# EAGLE board 48-tqfp breakout (EAGLE 9.2.2)
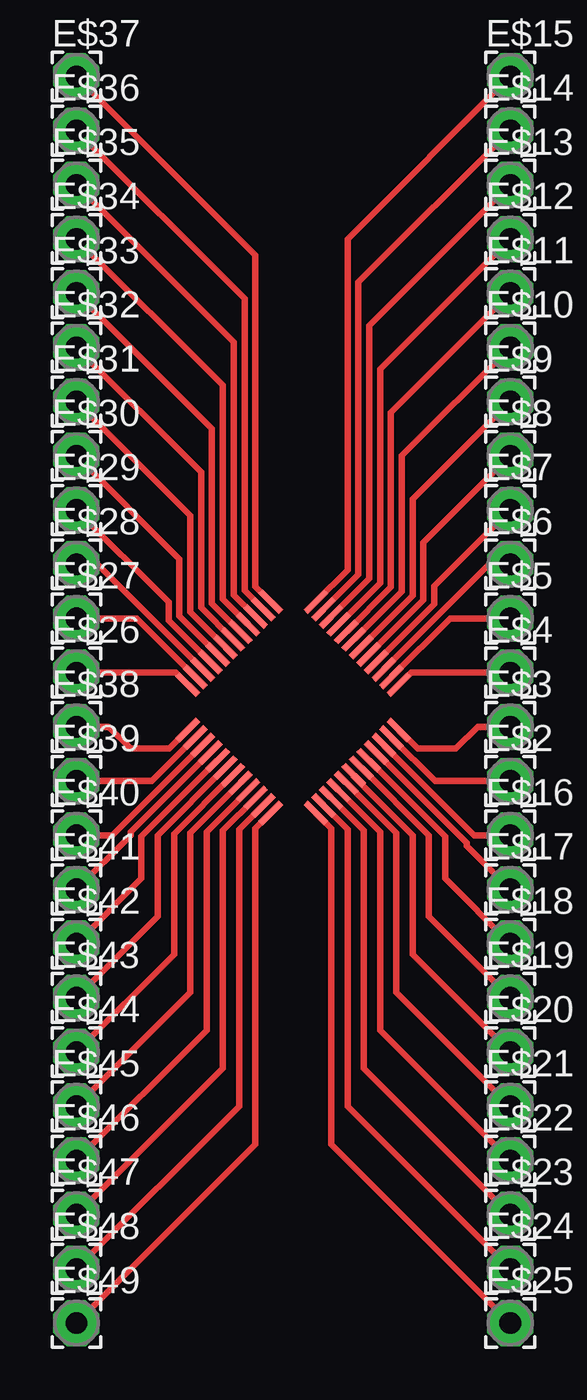
[diagram p0: board, top side]

No outline drawn. Coordinates in mm, seen from the top.
Copper layers (1*16): Top 0.035mm / dielectric 1.5mm / Bottom 0.035mm
Design rules "default": minimum track width 6mil, minimum drill 0.35mm, track to track 6mil, track to pad 6mil, pad to pad 6mil, via to via 6mil, smd to smd 6mil, copper to edge 40mil, drill to drill 6mil, minimum pad ring 10mil, minimum via ring 8mil, stop-mask expansion 4mil, vias tented up to drill 0mil, thermal gap 10mil

## Footprints (pad centres in the part's own frame; a part is rotated, then mirrored left to right if it is on the bottom)
TQFP-48 = smd 1.35 x 0.29: 1 -4,2.5; 2 -4,2; 3 -4,1.5; 4 -4,1; 5 -4,0.5; 6 -4,0; 7 -4,-0.5; 8 -4,-1; 9 -4,-1.5; 10 -4,-2; 11 -4,-2.5; 12 -4,-3; 25 4.5,-3; 26 4.5,-2.5; 27 4.5,-2; 28 4.5,-1.5; 29 4.5,-1; 30 4.5,-0.5; 31 4.5,0; 32 4.5,0.5; 33 4.5,1; 34 4.5,1.5; 35 4.5,2; 36 4.5,2.5 | smd 0.29 x 1.35: 13 -2.5,-4.5; 14 -2,-4.5; 15 -1.5,-4.5; 16 -1,-4.5; 17 -0.5,-4.5; 18 0,-4.5; 19 0.5,-4.5; 20 1,-4.5; 21 1.5,-4.5; 22 2,-4.5; 23 2.5,-4.5; 24 3,-4.5; 37 3,4; 38 2.5,4; 39 2,4; 40 1.5,4; 41 1,4; 42 0.5,4; 43 0,4; 44 -0.5,4; 45 -1,4; 46 -1.5,4; 47 -2,4; 48 -2.5,4
2,15/1,0 = drill 1.016 pad 2.159 octagon: 1 0,0

## Placement (x,y rotation side)
E$1  [TQFP-48]  15.24,8.89 315 top
E$2  [2,15/1,0]  25.4,5.08 0 top
E$3  [2,15/1,0]  25.4,7.62 0 top
E$4  [2,15/1,0]  25.4,10.16 0 top
E$5  [2,15/1,0]  25.4,12.7 0 top
E$6  [2,15/1,0]  25.4,15.24 0 top
E$7  [2,15/1,0]  25.4,17.78 0 top
E$8  [2,15/1,0]  25.4,20.32 0 top
E$9  [2,15/1,0]  25.4,22.86 0 top
E$10  [2,15/1,0]  25.4,25.4 0 top
E$11  [2,15/1,0]  25.4,27.94 0 top
E$12  [2,15/1,0]  25.4,30.48 0 top
E$13  [2,15/1,0]  25.4,33.02 0 top
E$14  [2,15/1,0]  25.4,35.56 0 top
E$15  [2,15/1,0]  25.4,38.1 0 top
E$16  [2,15/1,0]  25.4,2.54 0 top
E$17  [2,15/1,0]  25.4,0 0 top
E$18  [2,15/1,0]  25.4,-2.54 0 top
E$19  [2,15/1,0]  25.4,-5.08 0 top
E$20  [2,15/1,0]  25.4,-7.62 0 top
E$21  [2,15/1,0]  25.4,-10.16 0 top
E$22  [2,15/1,0]  25.4,-12.7 0 top
E$23  [2,15/1,0]  25.4,-15.24 0 top
E$24  [2,15/1,0]  25.4,-17.78 0 top
E$25  [2,15/1,0]  25.4,-20.32 0 top
E$26  [2,15/1,0]  5.08,10.16 0 top
E$27  [2,15/1,0]  5.08,12.7 0 top
E$28  [2,15/1,0]  5.08,15.24 0 top
E$29  [2,15/1,0]  5.08,17.78 0 top
E$30  [2,15/1,0]  5.08,20.32 0 top
E$31  [2,15/1,0]  5.08,22.86 0 top
E$32  [2,15/1,0]  5.08,25.4 0 top
E$33  [2,15/1,0]  5.08,27.94 0 top
E$34  [2,15/1,0]  5.08,30.48 0 top
E$35  [2,15/1,0]  5.08,33.02 0 top
E$36  [2,15/1,0]  5.08,35.56 0 top
E$37  [2,15/1,0]  5.08,38.1 0 top
E$38  [2,15/1,0]  5.08,7.62 0 top
E$39  [2,15/1,0]  5.08,5.08 0 top
E$40  [2,15/1,0]  5.08,2.54 0 top
E$41  [2,15/1,0]  5.08,0 0 top
E$42  [2,15/1,0]  5.08,-2.54 0 top
E$43  [2,15/1,0]  5.08,-5.08 0 top
E$44  [2,15/1,0]  5.08,-7.62 0 top
E$45  [2,15/1,0]  5.08,-10.16 0 top
E$46  [2,15/1,0]  5.08,-12.7 0 top
E$47  [2,15/1,0]  5.08,-15.24 0 top
E$48  [2,15/1,0]  5.08,-17.78 0 top
E$49  [2,15/1,0]  5.08,-20.32 0 top

## Library data of the parts
E$1 = my library
E$2-E$49 = wirepad

## Nets
S$1: E$1.24 E$49.1
S$2: E$1.23 E$48.1
S$3: E$1.22 E$47.1
S$4: E$1.21 E$46.1
S$5: E$1.20 E$45.1
S$6: E$1.19 E$44.1
S$7: E$1.18 E$43.1
S$8: E$1.17 E$42.1
S$9: E$1.16 E$41.1
S$10: E$1.15 E$40.1
S$11: E$1.14 E$39.1
S$12: E$1.13 E$38.1
S$13: E$1.12 E$26.1
S$14: E$1.11 E$27.1
S$15: E$1.10 E$28.1
S$16: E$1.9 E$29.1
S$17: E$1.8 E$30.1
S$18: E$1.7 E$31.1
S$19: E$1.6 E$32.1
S$20: E$1.5 E$33.1
S$21: E$1.4 E$34.1
S$22: E$1.3 E$35.1
S$23: E$1.2 E$36.1
S$24: E$1.1 E$37.1
S$25: E$1.25 E$25.1
S$26: E$1.26 E$24.1
S$27: E$1.27 E$23.1
S$28: E$1.28 E$22.1
S$29: E$1.29 E$21.1
S$30: E$1.30 E$20.1
S$31: E$1.31 E$19.1
S$32: E$1.32 E$18.1
S$33: E$1.33 E$17.1
S$34: E$1.34 E$16.1
S$35: E$1.35 E$2.1
S$36: E$1.36 E$3.1
S$37: E$1.37 E$4.1
S$38: E$1.38 E$5.1
S$39: E$1.39 E$6.1
S$40: E$1.40 E$7.1
S$41: E$1.41 E$8.1
S$42: E$1.42 E$9.1
S$43: E$1.43 E$10.1
S$44: E$1.44 E$11.1
S$45: E$1.45 E$12.1
S$46: E$1.46 E$13.1
S$47: E$1.47 E$14.1
S$48: E$1.48 E$15.1

## Tracks (layer width: path | path; a pad name or v marks a point on that pad's centre or on a via)
S$1
  Top 0.305: E$49.1 13.46,-11.94 13.46,2.87 E$1.24
S$2
  Top 0.305: E$48.1 12.7,-10.16 12.7,2.81 E$1.23
S$3
  Top 0.305: E$47.1 11.94,-8.38 11.94,2.76 E$1.22
S$4
  Top 0.305: E$46.1 11.18,-6.6 11.18,2.71 E$1.21
S$5
  Top 0.305: E$45.1 10.41,-4.83 10.41,2.65 E$1.20
S$6
  Top 0.305: E$44.1 9.65,-3.05 9.65,2.6 E$1.19
S$7
  Top 0.305: E$43.1 8.89,-1.27 8.89,2.54 E$1.18
S$8
  Top 0.305: E$42.1 8.13,0.51 8.13,2.48 E$1.17
S$9
  Top 0.305: E$41.1 7.62,2.54 7.62,2.68 E$1.16
S$10
  Top 0.305: E$40.1 6.77,2.54 E$1.15
S$11
  Top 0.305: E$39.1 8.6,5.08 E$1.14
S$12
  Top 0.305: E$38.1 6.6,7.62 7.62,6.6 9.42,6.6 E$1.13
S$13
  Top 0.305: E$1.12 9.73,10.16 E$26.1
S$14
  Top 0.305: E$27.1 7.89,12.7 E$1.11
S$15
  Top 0.305: E$28.1 6.06,15.24 E$1.10
S$16
  Top 0.305: E$29.1 9.4,13.46 9.4,12.61 E$1.9
S$17
  Top 0.305: E$30.1 9.91,15.49 9.91,12.81 E$1.8
S$18
  Top 0.305: E$1.7 10.41,13.01 10.41,17.53 E$31.1
S$19
  Top 0.305: E$32.1 10.92,19.56 10.92,13.21 E$1.6
S$20
  Top 0.305: E$33.1 11.43,21.59 11.43,13.41 E$1.5
S$21
  Top 0.305: E$34.1 11.94,23.62 11.94,13.61 E$1.4
S$22
  Top 0.305: E$35.1 12.45,25.65 12.45,13.8 E$1.3
S$23
  Top 0.305: E$36.1 12.95,27.69 12.95,14 E$1.2
S$24
  Top 0.305: E$37.1 13.46,29.72 13.46,14.2 E$1.1
S$25
  Top 0.305: E$25.1 17.02,-11.94 17.02,2.87 E$1.25
S$26
  Top 0.305: E$24.1 17.78,-10.16 17.78,2.81 E$1.26
S$27
  Top 0.305: E$23.1 18.54,-8.38 18.54,2.76 E$1.27
S$28
  Top 0.305: E$22.1 19.3,-6.6 19.3,2.71 E$1.28
S$29
  Top 0.305: E$21.1 20.07,-4.83 20.07,2.65 E$1.29
S$30
  Top 0.305: E$20.1 20.83,-3.05 20.83,2.54 18.07,5.3 E$1.30
S$31
  Top 0.305: E$19.1 21.59,-1.27 21.59,2.54 E$1.31
S$32
  Top 0.305: E$18.1 22.35,0.51 22.35,2.48 E$1.32
S$33
  Top 0.305: E$17.1 23.37,2.03 23.37,2.18 E$1.33
S$34
  Top 0.305: E$16.1 23.71,2.54 E$1.34
S$35
  Top 0.305: E$2.1 21.88,5.08 E$1.35
S$36
  Top 0.305: E$3.1 23.88,7.62 22.86,6.6 21.06,6.6 E$1.36
S$37
  Top 0.305: E$4.1 20.75,10.16 E$1.37
S$38
  Top 0.305: E$5.1 22.59,12.7 E$1.38
S$39
  Top 0.305: E$6.1 24.42,15.24 E$1.39
S$40
  Top 0.305: E$7.1 21.84,14.22 21.84,13.37 E$1.40
S$41
  Top 0.305: E$8.1 21.34,16.26 21.34,13.57 E$1.41
S$42
  Top 0.305: E$9.1 20.83,18.29 20.83,13.77 E$1.42
S$43
  Top 0.305: E$10.1 20.32,20.32 20.32,13.97 E$1.43
S$44
  Top 0.305: E$11.1 19.81,22.35 19.81,14.17 E$1.44
S$45
  Top 0.305: E$12.1 19.3,24.38 19.3,14.37 E$1.45
S$46
  Top 0.305: E$13.1 18.8,26.42 18.8,14.57 E$1.46
S$47
  Top 0.305: E$14.1 18.29,28.45 18.29,14.77 E$1.47
S$48
  Top 0.305: E$15.1 17.78,30.48 17.78,14.97 E$1.48